# EAGLE board servo_cape (EAGLE 7.2.0)

Size 160 x 100 mm. Coordinates in mm from the lower left corner, seen from the top.
Outline: 160,0 160,100 0,100 0,21.08
Outline: 0,21.08 0,0 86.36,0 86.36,54.61 5.59,54.61 5.59,38.86 20.32,38.86 20.32,21.08 0,21.08
Copper layers (1*16): Top 0.035mm / dielectric 1.5mm / Bottom 0.035mm
Design rules "default": minimum track width 10mil, minimum drill 24mil, track to track 8mil, track to pad 8mil, pad to pad 8mil, via to via 8mil, smd to smd 8mil, copper to edge 40mil, drill to drill 8mil, minimum pad ring 10mil, minimum via ring 8mil, stop-mask expansion 4mil, vias tented up to drill 0mil, thermal gap 10mil
Net classes: 0 default: width 0.203 mm, drill 0.508 mm, clearance 0.254 mm

## Footprints (pad centres in the part's own frame; a part is rotated, then mirrored left to right if it is on the bottom)
EIA3216 = smd 1.4 x 1.6: A 1.4,0; C -1.4,0
0805 = smd 0.8 x 1.2: 1 -0.9,0; 2 0.9,0
EIA7343 = smd 2.55 x 2.7: A 3.17,0; C -3.17,0
FKIT-LED-1206 = smd 1.6 x 1.803: A -1.422,0; C 1.422,0
DO41-10 = drill 1.118: A 5.08,0; C -5.08,0
7395-02 = drill 1.016 long: 1 1.27,0; 2 -1.27,0
7395-03 = drill 1.016 long: 1 2.54,0; 2 0,0; 3 -2.54,0
R0805W = smd 1.5 x 1: 1 -1.052,0; 2 1.052,0
TACTILE_SWITCH_TALL = smd 1.55 x 1.3: A1 -3.975,-2.25; A2 3.975,-2.25; B1 -3.975,2.25; B2 3.975,2.25
SOT230P696X180-4N = smd 1.6 x 0.838: 1 -3.2,2.311; 2 -3.2,0; 3 -3.2,-2.311 | smd 1.6 x 3.023: 4 3.2,0
SOP65P810X120-38N = smd 1.473 x 0.356: 1 -3.785,5.842; 2 -3.785,5.207; 3 -3.785,4.547; 4 -3.785,3.912; 5 -3.785,3.251; 6 -3.785,2.591; 7 -3.785,1.956; 8 -3.785,1.295; 9 -3.785,0.66; 10 -3.785,0; 11 -3.785,-0.66; 12 -3.785,-1.295; 13 -3.785,-1.956; 14 -3.785,-2.591; 15 -3.785,-3.251; 16 -3.785,-3.912; 17 -3.785,-4.547; 18 -3.785,-5.207; 19 -3.785,-5.842; 20 3.785,-5.842; 21 3.785,-5.207; 22 3.785,-4.547; 23 3.785,-3.912; 24 3.785,-3.251; 25 3.785,-2.591; 26 3.785,-1.956; 27 3.785,-1.295; 28 3.785,-0.66; 29 3.785,0; 30 3.785,0.66; 31 3.785,1.295; 32 3.785,1.956; 33 3.785,2.591; 34 3.785,3.251; 35 3.785,3.912; 36 3.785,4.547; 37 3.785,5.207; 38 3.785,5.842
BEAGLE_BONE_BLACK_CAPE = drill 1.016 pad 1.88 square: P8.1 20.32,50.165; P9.1 20.32,1.905 | drill 1.016 pad 1.88: P8.2 20.32,52.705; P8.3 22.86,50.165; P8.4 22.86,52.705; P8.5 25.4,50.165; P8.6 25.4,52.705; P8.7 27.94,50.165; P8.8 27.94,52.705; P8.9 30.48,50.165; P8.10 30.48,52.705; P8.11 33.02,50.165; P8.12 33.02,52.705; P8.13 35.56,50.165; P8.14 35.56,52.705; P8.15 38.1,50.165; P8.16 38.1,52.705; P8.17 40.64,50.165; P8.18 40.64,52.705; P8.19 43.18,50.165; P8.20 43.18,52.705; P8.21 45.72,50.165; P8.22 45.72,52.705; P8.23 48.26,50.165; P8.24 48.26,52.705; P8.25 50.8,50.165; P8.26 50.8,52.705; P8.27 53.34,50.165; P8.28 53.34,52.705; P8.29 55.88,50.165; P8.30 55.88,52.705; P8.31 58.42,50.165; P8.32 58.42,52.705; P8.33 60.96,50.165; P8.34 60.96,52.705; P8.35 63.5,50.165; P8.36 63.5,52.705; P8.37 66.04,50.165; P8.38 66.04,52.705; P8.39 68.58,50.165; P8.40 68.58,52.705; P8.41 71.12,50.165; P8.42 71.12,52.705; P8.43 73.66,50.165; P8.44 73.66,52.705; P8.45 76.2,50.165; P8.46 76.2,52.705; P9.2 20.32,4.445; P9.3 22.86,1.905; P9.4 22.86,4.445; P9.5 25.4,1.905; P9.6 25.4,4.445; P9.7 27.94,1.905; P9.8 27.94,4.445; P9.9 30.48,1.905; P9.10 30.48,4.445; P9.11 33.02,1.905; P9.12 33.02,4.445; P9.13 35.56,1.905; P9.14 35.56,4.445; P9.15 38.1,1.905; P9.16 38.1,4.445; P9.17 40.64,1.905; P9.18 40.64,4.445; P9.19 43.18,1.905; P9.20 43.18,4.445; P9.21 45.72,1.905; P9.22 45.72,4.445; P9.23 48.26,1.905; P9.24 48.26,4.445; P9.25 50.8,1.905; P9.26 50.8,4.445; P9.27 53.34,1.905; P9.28 53.34,4.445; P9.29 55.88,1.905; P9.30 55.88,4.445; P9.31 58.42,1.905; P9.32 58.42,4.445; P9.33 60.96,1.905; P9.34 60.96,4.445; P9.35 63.5,1.905; P9.36 63.5,4.445; P9.37 66.04,1.905; P9.38 66.04,4.445; P9.39 68.58,1.905; P9.40 68.58,4.445; P9.41 71.12,1.905; P9.42 71.12,4.445; P9.43 73.66,1.905; P9.44 73.66,4.445; P9.45 76.2,1.905; P9.46 76.2,4.445 | hole 3.175: 14.605,3.175; 80.645,6.35; 80.645,48.26; 14.605,51.435
NANO_FUSE = smd 2.286 x 3.048: 1 -2.413,0; 2 2.413,0
DEBUG_SM = smd 0.76 x 2.2: 1 0,1.85; 2 0,-1.85; 3 1.27,1.85; 4 1.27,-1.85; 5 2.54,1.85; 6 2.54,-1.85; 7 3.81,1.85; 8 3.81,-1.85; 9 5.08,1.85; 10 5.08,-1.85; 11 6.35,1.85; 12 6.35,-1.85; 13 7.62,1.85; 14 7.62,-1.85

## Placement (x,y rotation side)
C10  10uF  [EIA3216]  -24.13,104.14 0 top  (outside the outline)
C11  10uF  [EIA3216]  -30.48,104.14 0 top  (outside the outline)
C12  40nF  [0805]  -91.44,97.79 0 top  (outside the outline)
C14  .1uF  [0805]  -99.06,97.79 0 top  (outside the outline)
C15  10uF  [0805]  -15.24,104.14 0 top  (outside the outline)
C16  2.2nF  [0805]  -19.05,104.14 0 top  (outside the outline)
C22  100uF  [EIA7343]  -77.47,99.06 0 top  (outside the outline)
D1  3_3V_PWR  [FKIT-LED-1206]  -69.85,85.09 0 top  (outside the outline)
D2  5V Logic  [FKIT-LED-1206]  -78.74,85.09 0 top  (outside the outline)
D3  1N4004  [DO41-10]  29.21,13.46 0 top
D4  Supply2  [FKIT-LED-1206]  -163.83,-82.55 0 top  (outside the outline)
D5  Supply1  [FKIT-LED-1206]  -163.83,-95.25 0 top  (outside the outline)
D6  Usr 1  [FKIT-LED-1206]  -163.83,-107.95 0 top  (outside the outline)
D7  Usr 2  [FKIT-LED-1206]  -163.83,-120.65 0 top  (outside the outline)
DATA_POWER  22-05-7028-02  [7395-02]  5.08,5.08 270 top
J1  22-05-7038-03  [7395-03]  84.07,49.78 90 top
J2  22-05-7038-03  [7395-03]  84.07,41.15 90 top
J3  22-05-7038-03  [7395-03]  84.07,32.51 90 top
J4  22-05-7038-03  [7395-03]  84.07,23.62 90 top
J5  22-05-7038-03  [7395-03]  84.07,14.99 90 top
J6  22-05-7038-03  [7395-03]  8.89,46.48 270 top
J7  22-05-7038-03  [7395-03]  84.07,6.1 90 top
R1  4.7K  [R0805W]  -92.71,85.09 0 top  (outside the outline)
R2  4.7K  [R0805W]  -99.06,85.09 0 top  (outside the outline)
R3  0  [R0805W]  -165.1,-50.8 0 top  (outside the outline)
R4  0  [R0805W]  -165.1,-76.2 0 top  (outside the outline)
R5  330  [R0805W]  -41.91,99.06 0 top  (outside the outline)
R6  220  [R0805W]  -46.99,99.06 0 top  (outside the outline)
R7  49.9k  [R0805W]  -86.36,85.09 0 top  (outside the outline)
R8  220  [R0805W]  -52.07,99.06 0 top  (outside the outline)
R9  220  [R0805W]  -57.15,99.06 0 top  (outside the outline)
R10  330  [R0805W]  -16.51,99.06 0 top  (outside the outline)
R11  330  [R0805W]  -165.1,-88.9 0 top  (outside the outline)
R12  330  [R0805W]  -165.1,-101.6 0 top  (outside the outline)
R13  330  [R0805W]  -165.1,-114.3 0 top  (outside the outline)
R14  330  [R0805W]  -165.1,-127 0 top  (outside the outline)
S1  RESET  [TACTILE_SWITCH_TALL]  70.87,12.7 180 top
SERVO_PWR1  22-05-7028-02  [7395-02]  5.08,11.43 270 top
SERVO_PWR2  22-05-7028-02  [7395-02]  5.08,17.78 270 top
U5  LMS8117AMP-3.3  [SOT230P696X180-4N]  35.31,26.92 0 top
U6  MSP430FR5739IDA  [SOP65P810X120-38N]  57.4,25.91 0 top
U$1  BEAGLE_BONE_BLACK_CAPE  [BEAGLE_BONE_BLACK_CAPE]  0,0 0 top
U$3  NANO_FUSE  [NANO_FUSE]  29.21,9.14 0 top
U$12  DEBUG_CON  [DEBUG_SM]  53.34,9.4 0 top

## Library data of the parts
C10 C11 = SparkFun-Capacitors; PROD_ID: CAP-00811
C12 C14-C16 = SparkFun-Capacitors
C22 = SparkFun-Capacitors; PROD_ID: CAP-07890
D1 D2 D4-D7 = SparkFun-LED
D3 = diode
DATA_POWER SERVO_PWR1 SERVO_PWR2 = con-molex; OC_FARNELL: 9731601; OC_NEWARK: unknown
J1-J7 = con-molex; OC_FARNELL: unknown; OC_NEWARK: unknown
R1-R14 = rcl
S1 = SparkFun-Electromechanical; PROD_ID: SWCH-11966
U5 = NSC-LMS8117AMP; MPN: LMS8117AMP-3.3; OC_FARNELL: 1469032; OC_NEWARK: 41K3020; PACKAGE: SOT-223-3; SUPPLIER: National Semiconductor
U6 = TI-MSP430FR5739; MPN: MSP430FR5739IDA; OC_FARNELL: 2148662; OC_NEWARK: 28W4632; PACKAGE: TSSOP-38; SUPPLIER: TEXAS INSTRUMENTS
U$1 = SparkFun-Boards
U$3 = custom_fuses
U$12 = range_cape

## Nets
3.3V: C11.A C14.1 C15.1 R1.2 R2.2 R5.1 R6.2 R7.2 R9.2 U5.4 U6.4 U6.34
5V: C10.A C22.A D3.C R10.2 U5.3
+5V_LOGIC: DATA_POWER.1 U$3.1
+5V_SUPPLY1: J1.2 J2.2 J3.2 J4.2 J5.2 R12.2 SERVO_PWR1.1
+5V_SUPPLY2: J6.2 J7.2 R11.2 SERVO_PWR2.1
GND: C10.C C11.C C12.1 C14.2 C15.2 C16.2 C22.C D1.C D2.C D6.C D7.C DATA_POWER.2 R4.2 S1.A2 U5.1 U6.3 U6.33 U6.38 U$1.P8.1 U$1.P8.2 U$1.P9.1 U$1.P9.2 U$1.P9.43 U$1.P9.44 U$1.P9.45 U$1.P9.46 U$12.9
GND_SUPPLY1: D5.C J1.3 J2.3 J3.3 J4.3 J5.3 R3.1 SERVO_PWR1.2
GND_SUPPLY2: D4.C J6.3 J7.3 R3.2 R4.1 SERVO_PWR2.2
N$1: R14.2 U6.9
N$2: D5.A R12.1
N$3: D4.A R11.1
N$4: R6.1 U$12.4
N$5: D6.A R13.1
N$6: D1.A R5.2
N$7: D7.A R14.1
N$8: R8.1 U$12.11
N$9: R9.1 U$12.2
N$10: R13.2 U6.8
N$13: D2.A R10.1
N$14: D3.A U$3.2
RESET: C16.1 R7.1 R8.2 S1.B2 U6.22
SCL: R2.1 U6.31 U$1.P9.19
SDA: R1.1 U6.30 U$1.P9.20
SERVO_1: J1.1 U6.5
SERVO_2: J2.1 U6.6
SERVO_3: J3.1 U6.7
SERVO_4: J4.1 U6.27
SERVO_5: J5.1 U6.26
SERVO_6: J6.1 U6.25
SERVO_7: J7.1 U6.24
SERVO_8: U6.14
SERVO_9: U6.13
SERVO_10: U6.12
TCK: U6.18 U$12.7
TDI: U6.16 U$12.3
TDO: U6.15 U$12.1
TEST: U6.21 U$12.8
TMS: U6.17 U$12.5
VCORE: C12.2 U6.32

## Tracks (layer width: path | path; a pad name or v marks a point on that pad's centre or on a via)
3.3V  (11 unrouted)
5V  (4 unrouted)
+5V_LOGIC  (1 unrouted)
+5V_SUPPLY1  (6 unrouted)
+5V_SUPPLY2  (3 unrouted)
GND  (26 unrouted)
GND_SUPPLY1  (7 unrouted)
GND_SUPPLY2  (5 unrouted)
N$1  (1 unrouted)
N$2  (1 unrouted)
N$3  (1 unrouted)
N$4  (1 unrouted)
N$5  (1 unrouted)
N$6  (1 unrouted)
N$7  (1 unrouted)
N$8  (1 unrouted)
N$9  (1 unrouted)
N$10  (1 unrouted)
N$13  (1 unrouted)
N$14  (1 unrouted)
RESET  (4 unrouted)
SCL  (2 unrouted)
SDA  (2 unrouted)
SERVO_1  (1 unrouted)
SERVO_2  (1 unrouted)
SERVO_3  (1 unrouted)
SERVO_4  (1 unrouted)
SERVO_5  (1 unrouted)
SERVO_6  (1 unrouted)
SERVO_7  (1 unrouted)
TCK  (1 unrouted)
TDI  (1 unrouted)
TDO  (1 unrouted)
TEST  (1 unrouted)
TMS  (1 unrouted)
VCORE  (1 unrouted)